# Altium PCB power_5V_3V3_V10 - 副本.PcbDoc
Units mm, origin at the board's own origin, x right, y up, seen from the top; angles counter-clockwise.
Board outline 32 x 50 mm, 2 copper layers (Top Layer, Bottom Layer); 18 components, 5 nets, 61 pads, 9 vias.
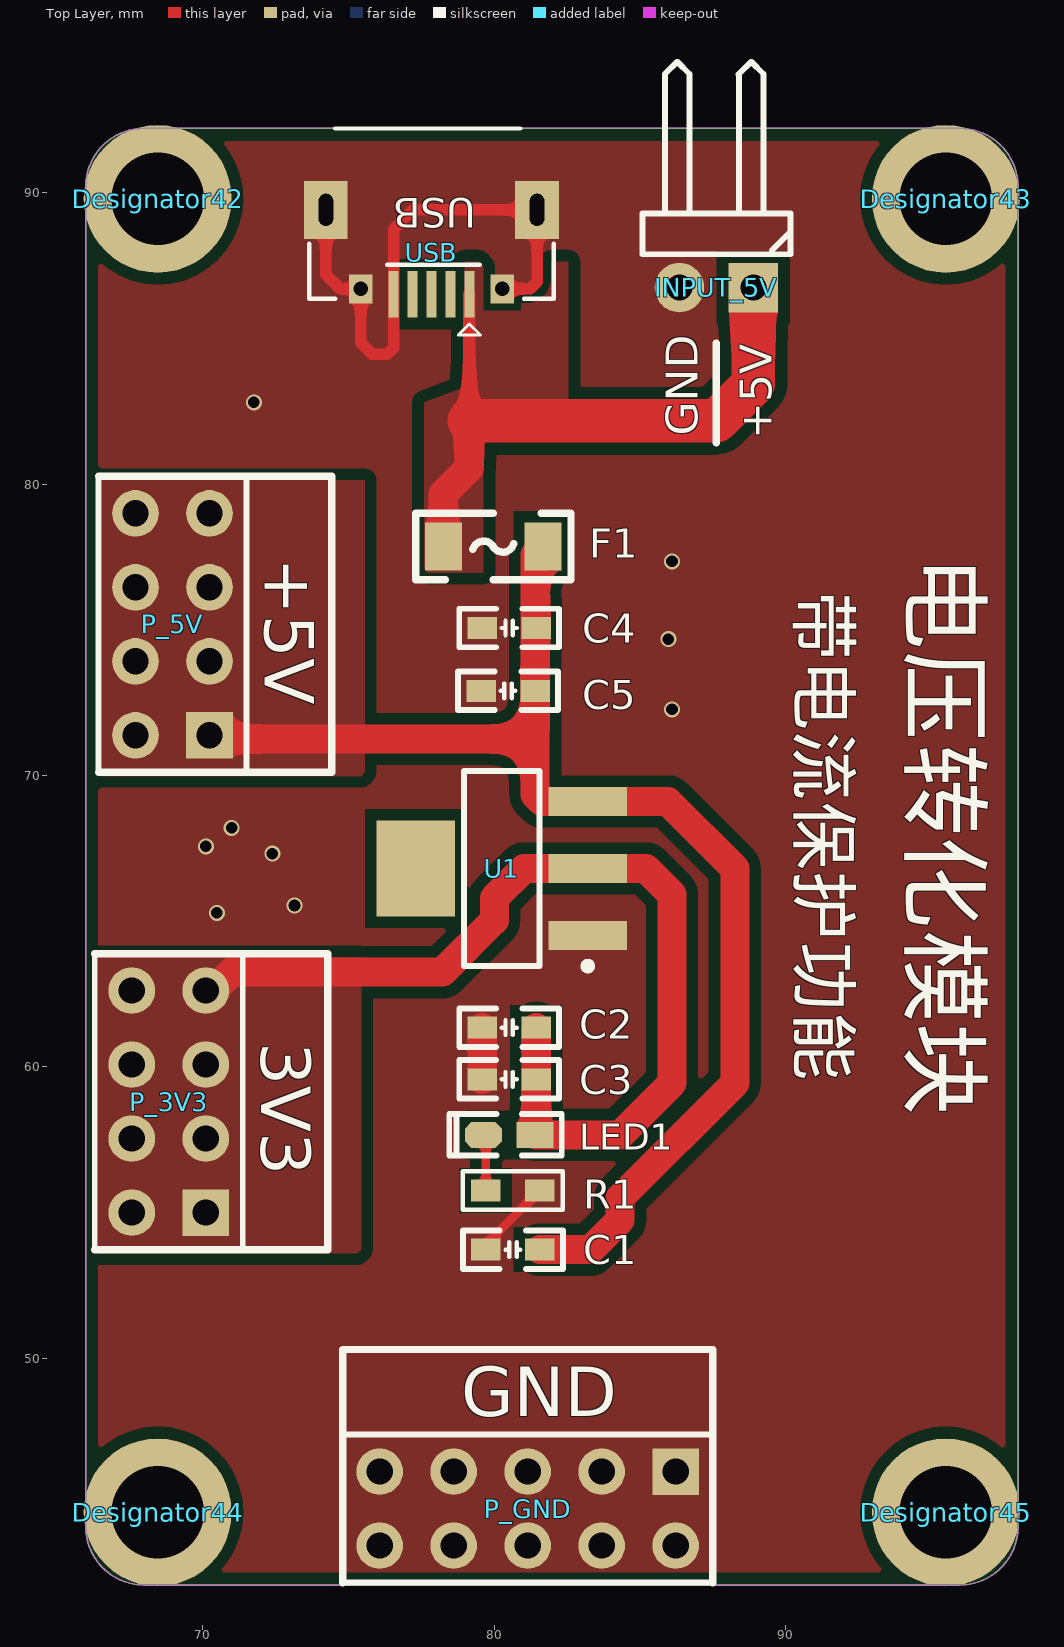
[diagram p0: Top Layer view]
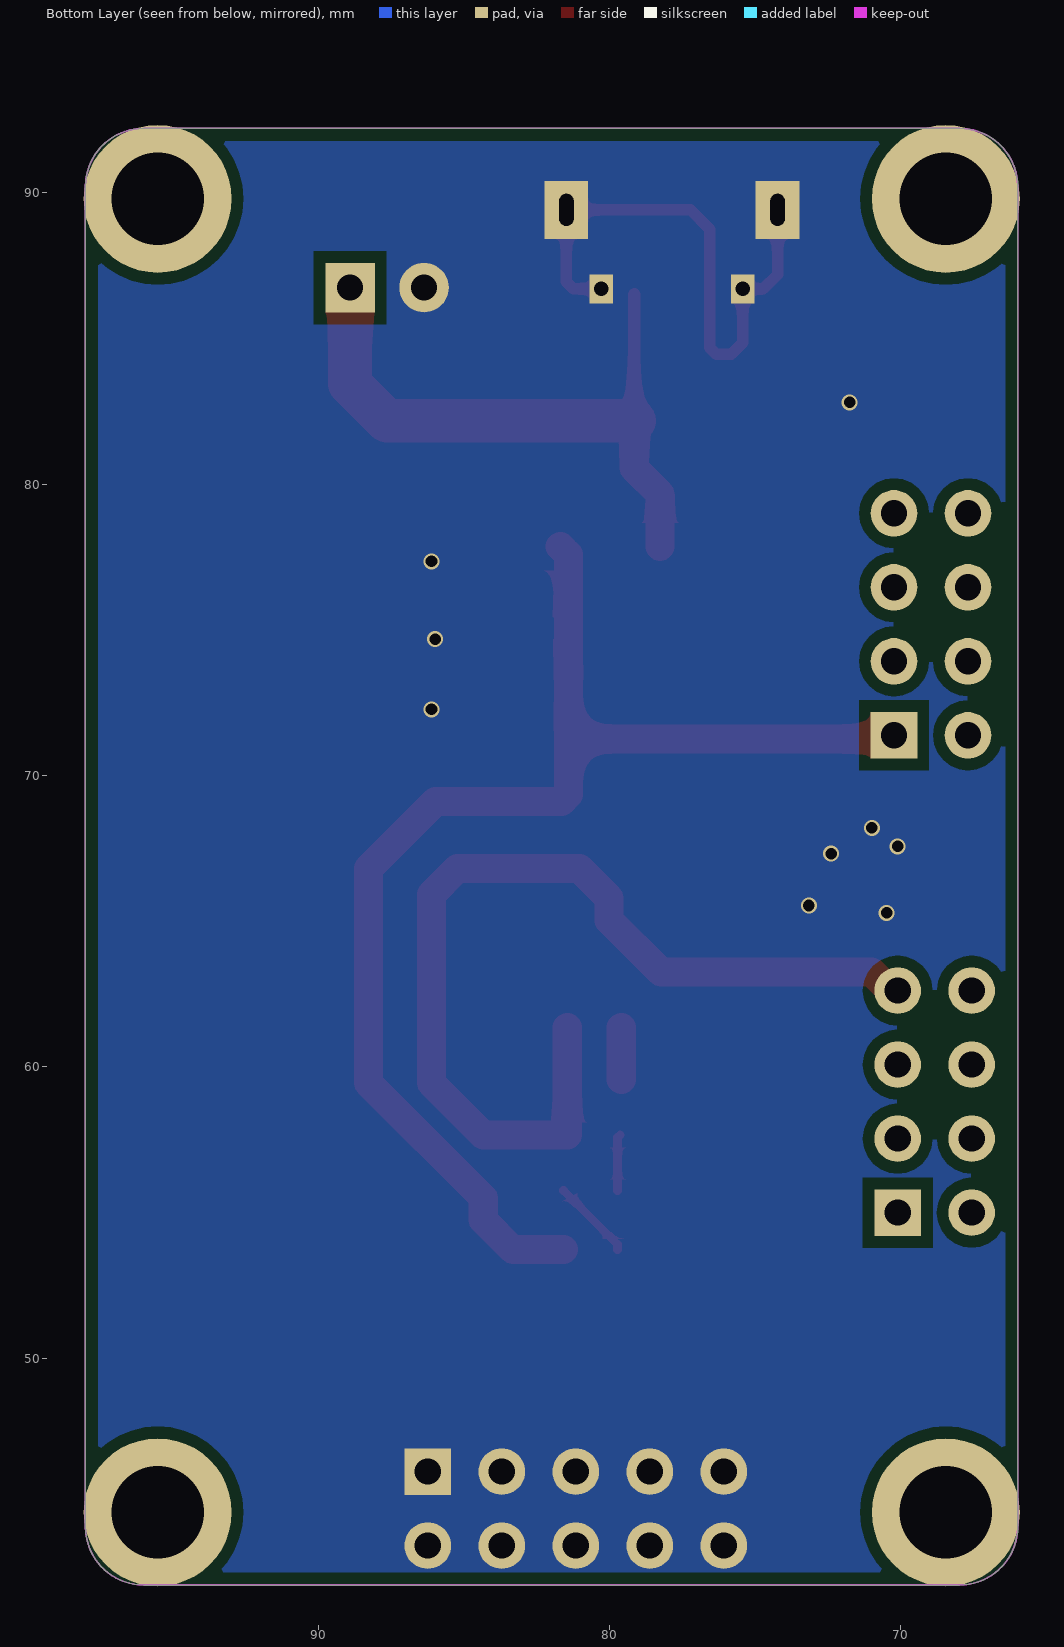
[diagram p1: Bottom Layer view, seen from below]

## Layer stack, top to bottom
Top Solder: solder mask 0.0102, Solder Resist, Dk 3.5
Top Layer: signal copper 0.0356
Dielectric 1: dielectric 0.32, FR-4, Dk 4.8
Bottom Layer: signal copper 0.0356
Bottom Solder: solder mask 0.0102, Solder Resist, Dk 3.5

## Board outline
65.984,44.208 ccw(c67.984,44.208) 67.984,42.208 95.984,42.208 ccw(c95.984,44.208) 97.984,44.208 97.984,90.208 ccw(c95.984,90.208) 95.984,92.208 67.984,92.208 ccw(c67.984,90.208) 65.984,90.208

## Design rules (kind name [scope] priority, off if disabled: settings)
Clearance Clearance_2 [InNamedPolygon('GND_L02_P012')] p1: gap=0.4
Clearance Clearance_1 [InNamedPolygon('NONET_L01_P008')] p2: gap=0.4
Clearance [All] p3: gap=0.254
PolygonConnect [All] p1: connectstyle=Direct reliefconductorwidth=0.254 reliefentries=4 polygonreliefangle="90 Angle" airgapwidth=0.254
RoutingVias [All] p1: holewidth=0.711 width=1.27 viastyle="Through Hole" minholewidth=0.711 minwidth=1.27 maxholewidth=0.711 maxwidth=1.27
SolderMaskExpansion [All] p1: expansion=0.102
Width [All] p1: maxlimit=10 minlimit=0.254 preferedwidth=0.254
30 further rules are at their usual default settings.

## Classes and differential pairs
component class power_5V_3V3_V10: C1 C2 C3 C4 C5 F1 INPUT_5V LED1 P_3V3 P_5V P_GND R1 U1 USB

## Components (designator, comment, footprint, x,y, rotation, side; value= is the part's Value field where it differs from the comment)
C1 "Cap" "C 0603_M" 80.645,53.721 r0 top
C2 "Cap" "C 0603_M" 80.518,61.341 r0 top
C3 "Cap" "C 0603_M" 80.518,59.563 r0 top
C4 "Cap" "C 0603_M" 80.518,75.057 r0 top
C5 "Cap" "C 0603_M" 80.48,72.898 r0 top
Designator42 "Comment" M3x10_L 68.453,89.789 r0 top locked
Designator43 "Comment" M3x10_L 95.504,89.789 r0 top locked
Designator44 "Comment" M3x10_L 68.453,44.704 r0 top locked
Designator45 "Comment" M3x10_L 95.504,44.704 r0 top locked
F1 "Fuse 2" "FU 1206" 79.972,77.851 r0 top
INPUT_5V "Header 2" HDR2.54-WI-2P 87.63,86.741 r180 top
LED1 "5V" "LED 0603Y" 80.518,57.658 r180 top
P_3V3 "Header 4X2" HDR2.54-LI-2x4P 68.834,58.801 r90 top
P_5V "Header 4X2" HDR2.54-LI-2x4P 68.961,75.184 r90 top
P_GND "Header 5X2" HDR2.54-LI-2x5P 81.153,44.831 r180 top
R1 "R1K" "R 0603-HP_M" 80.645,55.753 r180 top
U1 "AMS1117-3V3" SOT223_M 80.264,66.802 r180 top
USB "Header 5" USB-micro_A 77.851,89.408 r180 top

## Footprints (in the part's own frame and the unit in brackets; to place one, negate y for a bottom-side part, rotate by r counter-clockwise, add the part's x,y. Pads: shape width x height; smd on the part's side, far side on the other; paste and mask are expansions set on the pad)
"C 0603_M" [mil] "无极性贴片电容"
  rect 40x30 smd: 1(-36.5,0) 2(36.5,0)
  silkscreen extent -68,-26 68,26, body extent -31,-16 31,16, height 32
"FU 1206" [mil] "贴片保险丝"
  rect 50x65 smd: 1(-67.5,0) 2(67.5,0)
  silkscreen extent -105,-45 105,45, body extent -63,-32 63,32, height 34
HDR2.54-LI-2x4P [mm] "双排排针，4x2脚"
  rect 1.6x1.6 hole 0.9: 1(-3.81,-1.27)
  round 1.6 hole 0.9: 2(-3.81,1.27) 3(-1.27,-1.27) 4(-1.27,1.27) 5(1.27,-1.27) 6(1.27,1.27) 7(3.81,-1.27) 8(3.81,1.27)
  silkscreen extent -5.08,-2.54 5.08,2.54, body extent -5.08,-2.54 5.08,2.54, height 8.5
HDR2.54-LI-2x5P [mm] "双排排针，5x2脚"
  rect 1.6x1.6 hole 0.9: 1(-5.08,-1.27)
  round 1.6 hole 0.9: 2(-5.08,1.27) 3(-2.54,-1.27) 4(-2.54,1.27) 5(0,-1.27) 6(0,1.27) 7(2.54,-1.27) 8(2.54,1.27) 9(5.08,-1.27) 10(5.08,1.27)
  silkscreen extent -6.35,-2.54 6.35,2.54, body extent -6.35,-2.54 6.35,2.54, height 8.5
HDR2.54-WI-2P [mm] "弯脚排针，2脚"
  rect 1.7x1.7 hole 0.9: 1(-1.27,0)
  round 1.7 hole 0.9: 2(1.27,0)
  silkscreen extent -2.54,-7.76 2.54,-1.14, body extent -2.54,-7.77 2.54,1.27, height 4.85
"LED 0603Y" [mil] "黄色0603LED"
  rect 50x35 smd: 1(-35,0)
  oct 50x35 smd: 2(35,0)
  silkscreen extent -71,-28 81,28, body extent -32,-16 31,16, height 18
M3x10_L [mm] "M3铜柱，长：10mm"
  round 5.08 hole 3.175: 1(0,0)
  body extent -2.7,-2.35 2.7,2.35, height 10.05
"R 0603-HP_M" [mil] "1/10W高精度贴片电阻"
  rect 40x30 smd: 1(-36.5,0) 2(36.5,0)
  silkscreen extent -68,-26 68,26, body extent -31,-16 32,16, height 16
SOT223_M [mm] "SOT223, 4-Leads, Body 6.5x3.5mm, Pitch 2.3mm, Lead Span 7mm, IPC Low Density"
  rect 2.7x1 smd: 1(-2.95,2.3) 2(-2.95,0) 3(-2.95,-2.3)
  rect 2.7x3.3 smd: 4(2.95,0)
  silkscreen extent -3.08,-3.35 1.3,3.47, body extent -1.85,-3.35 1.85,3.35, height 1.7
USB-micro_A [mm] "micro型USB ，5.7*7.8*2.5mm"
  rect 0.35x1.6 smd: 1(-1.3,2.9) 2(-0.65,2.9) 3(0,2.9) 4(0.65,2.9) 5(1.3,2.9)
  rect 1.5x2 hole 0.5 slot 1.1 at 90 deg: 5(-3.625,0) 5(3.625,0)
  rect 0.8x1 hole 0.5: 5(-2.425,2.71) 5(2.425,2.71)
  silkscreen extent -4.19,-2.79 4.19,4.3, body extent -4,-2.71 4,2.89, height 2.8

## Part data
C1 C2 C3 C4 C5: "Capacitor"
F1: "Fuse"
INPUT_5V: "Header, 2-Pin"
LED1: library part LED2, "Typical RED, GREEN, YELLOW, AMBER GaAs LED"
P_3V3 P_5V: "Header, 4-Pin, Dual row"
P_GND: "Header, 5-Pin, Dual row"
R1: library part Res2, "Resistor"
U1: library part ASM1117-3V3
USB: "Header, 5-Pin"

## Via types
v1: diameter 0.55, hole 0.4, Top Layer to Bottom Layer, 9 vias

## Nets (pads, with @x,y where several pads share a name; then routed paths per layer and width w, separated by ;. In a path a pad name is that pad's centre, name@x,y a point inside that pad or via, vN(x,y) a via of type N, cw(c..) or ccw(c..) an arc to the next point about the centre after c; other vN are vias at no path point)
+3V3: C2.2 C3.2 LED1.1 P_3V3.1 P_3V3.2 P_3V3.3 P_3V3.4 P_3V3.5 P_3V3.6 P_3V3.7 P_3V3.8 U1.2 | length 34
  Top Layer w1: P_3V3.7@70.231,62.484 70.993,63.246 78.232,63.246 80.01,65.024 80.01,65.786 81.026,66.802 U1.2 85.217,66.802 86.106,65.913 86.106,59.436 84.328,57.658 81.445,57.658 C3.2 C2.2
+5V: C1.2 C4.2 C5.2 F1.2 P_5V.1 P_5V.2 P_5V.3 P_5V.4 P_5V.5 P_5V.6 P_5V.7 P_5V.8 U1.3 | length 44.6
  Top Layer w1: P_5V.1 70.358,71.247 81.407,71.247 ; C1.2 83.312,53.721 84.328,54.737 84.328,55.499 88.265,59.436 88.265,66.802 85.965,69.102 U1.3 81.647,69.102 81.407,69.342 81.407,71.247 ; F1.2 81.407,77.572 C5.2 81.407,71.247
GND: C1.1 C2.1 C3.1 C4.1 C5.1 INPUT_5V.2 P_GND.1 P_GND.2 P_GND.3 P_GND.4 P_GND.5 P_GND.6 P_GND.7 P_GND.8 P_GND.9 P_GND.10 R1.1 U1.1 USB.5 | length 24.5
  Top Layer w0.3: C1.1 79.718,53.899 R1.1
  Top Layer w0.4: USB.5@74.226,89.408 74.226,87.191 74.719,86.698 75.426,86.698 75.426,84.848 75.819,84.455 76.327,84.455 76.551,84.679 76.551,86.508 76.551,88.743 77.216,89.408 81.476,89.408 81.476,86.937 81.237,86.698 USB.5@80.276,86.698
  Top Layer w1: C3.1 C2.1
  other v1: 70.485,65.278 73.152,65.532 72.39,67.31 70.104,67.564 70.993,68.199 86.106,72.263 85.979,74.676 86.106,77.343 71.755,82.804
NetLED1_2: LED1.2 R1.2 | length 1.9
  Top Layer w0.3: LED1.2 79.718,57.569 R1.2
USB+5V: F1.1 INPUT_5V.1 USB.1 | length 22.6
  Top Layer w0.43: 79.151,82.169 USB.1
  Top Layer w1: F1.1 78.257,79.654 79.151,80.548 79.151,82.169
  Top Layer w1.5: 79.151,82.169 87.63,82.169 88.9,83.439 INPUT_5V.1
pads on no net: Designator42.1 Designator43.1 Designator44.1 Designator45.1 U1.4 USB.2 USB.3 USB.4

## Polygon pours and split planes (outlines as drawn)
GND on Top Layer "NONET_L01_P008" (solid, pour order 11): 65.984,44.208 ccw(c67.984,44.208) 67.984,42.208 95.984,42.208 ccw(c95.984,44.208) 97.984,44.208 97.984,90.208 ccw(c95.984,90.208) 95.984,92.208 67.984,92.208 ccw(c67.984,90.208) 65.984,90.208
USB+5V on Top Layer "USB+5V_L01_P006" (solid, remove dead copper, pour order 6): 77.597,77.978 77.597,82.804 79.629,83.566 79.629,76.962 77.724,76.962 77.597,77.089
USB+5V on Top Layer "USB+5V_L01_P004" (solid, remove dead copper, pour order 4): 78.994,87.63 78.994,82.296 82.55,82.296 82.55,87.63
+3V3 on Top Layer "+3V3_L01_P002" (solid, remove dead copper, pour order 2): 66.421,63.754 75.438,63.754 75.438,53.721 75.311,53.594 66.421,53.594
+5V on Top Layer "+5V_L01_P000" (solid, remove dead copper, pour order 0): 66.548,80.137 75.565,80.137 75.565,70.104 75.438,69.977 66.548,69.977
GND on Bottom Layer "GND_L02_P012" (solid, remove dead copper, pour order 12): 65.984,44.208 ccw(c67.984,44.208) 67.984,42.208 95.984,42.208 ccw(c95.984,44.208) 97.984,44.208 97.984,90.208 ccw(c95.984,90.208) 95.984,92.208 67.984,92.208 ccw(c67.984,90.208) 65.984,90.208

## Keep-outs
Keep-Out Layer:
  the board outline again, w0.056

## Silkscreen, mask and mechanical layers (free items; w line width, h text height)
Top Overlay:
  lines w0.254: 66.294,53.721 74.295,53.721 74.295,63.881 66.294,63.881 ; 66.421,70.104 74.422,70.104 74.422,80.264 66.421,80.264 ; 74.803,42.291 74.803,50.292 87.503,50.292 87.503,42.291 ; 87.63,81.407 87.63,84.836
  text "GND" at 86.995,81.661 h1.1 r90
  text "+5V" at 89.535,81.534 h1.1 r90
  text "+5V" at 72.136,77.47 h1.7 r270
  text "电压转化模块" at 93.599,77.47 h4 r270
  text "带电流保护功能" at 89.916,76.327 h3 r270
  text "3V3" at 72.009,60.833 h1.7 r270
  text "GND" at 78.867,48.006 h1.7